# Altium PCB Inverter Processor PCB.PcbDoc (part 1 of 3)
Units mm, origin at the board's own origin, x right, y up, seen from the top; angles counter-clockwise.
Board outline 180 x 80 mm, 4 copper layers (Top Layer, Internal Plane 1, Internal Plane 2, Bottom Layer); 207 components, 146 nets, 658 pads, 294 vias.
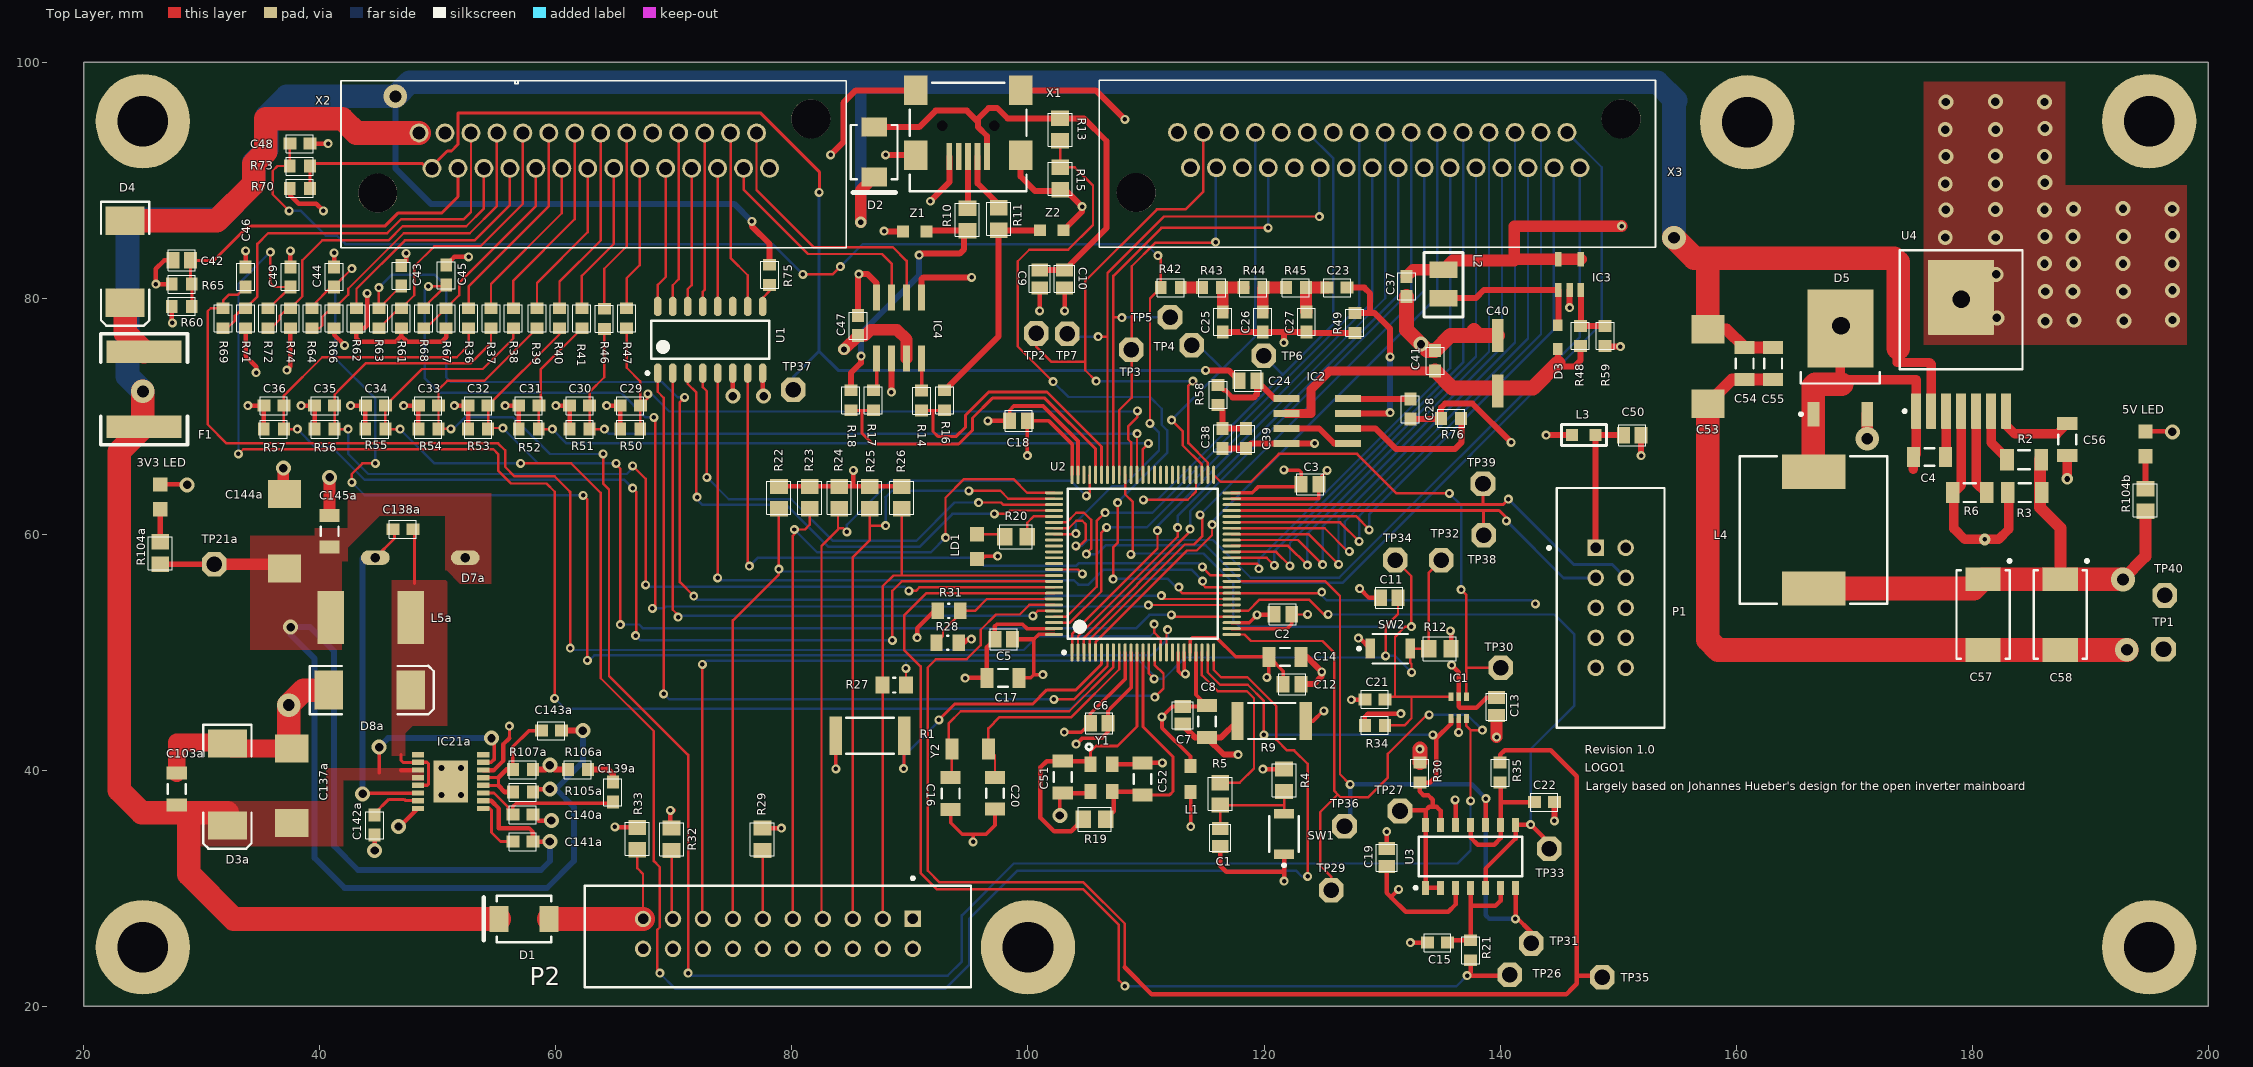
[diagram p0: Top Layer view]
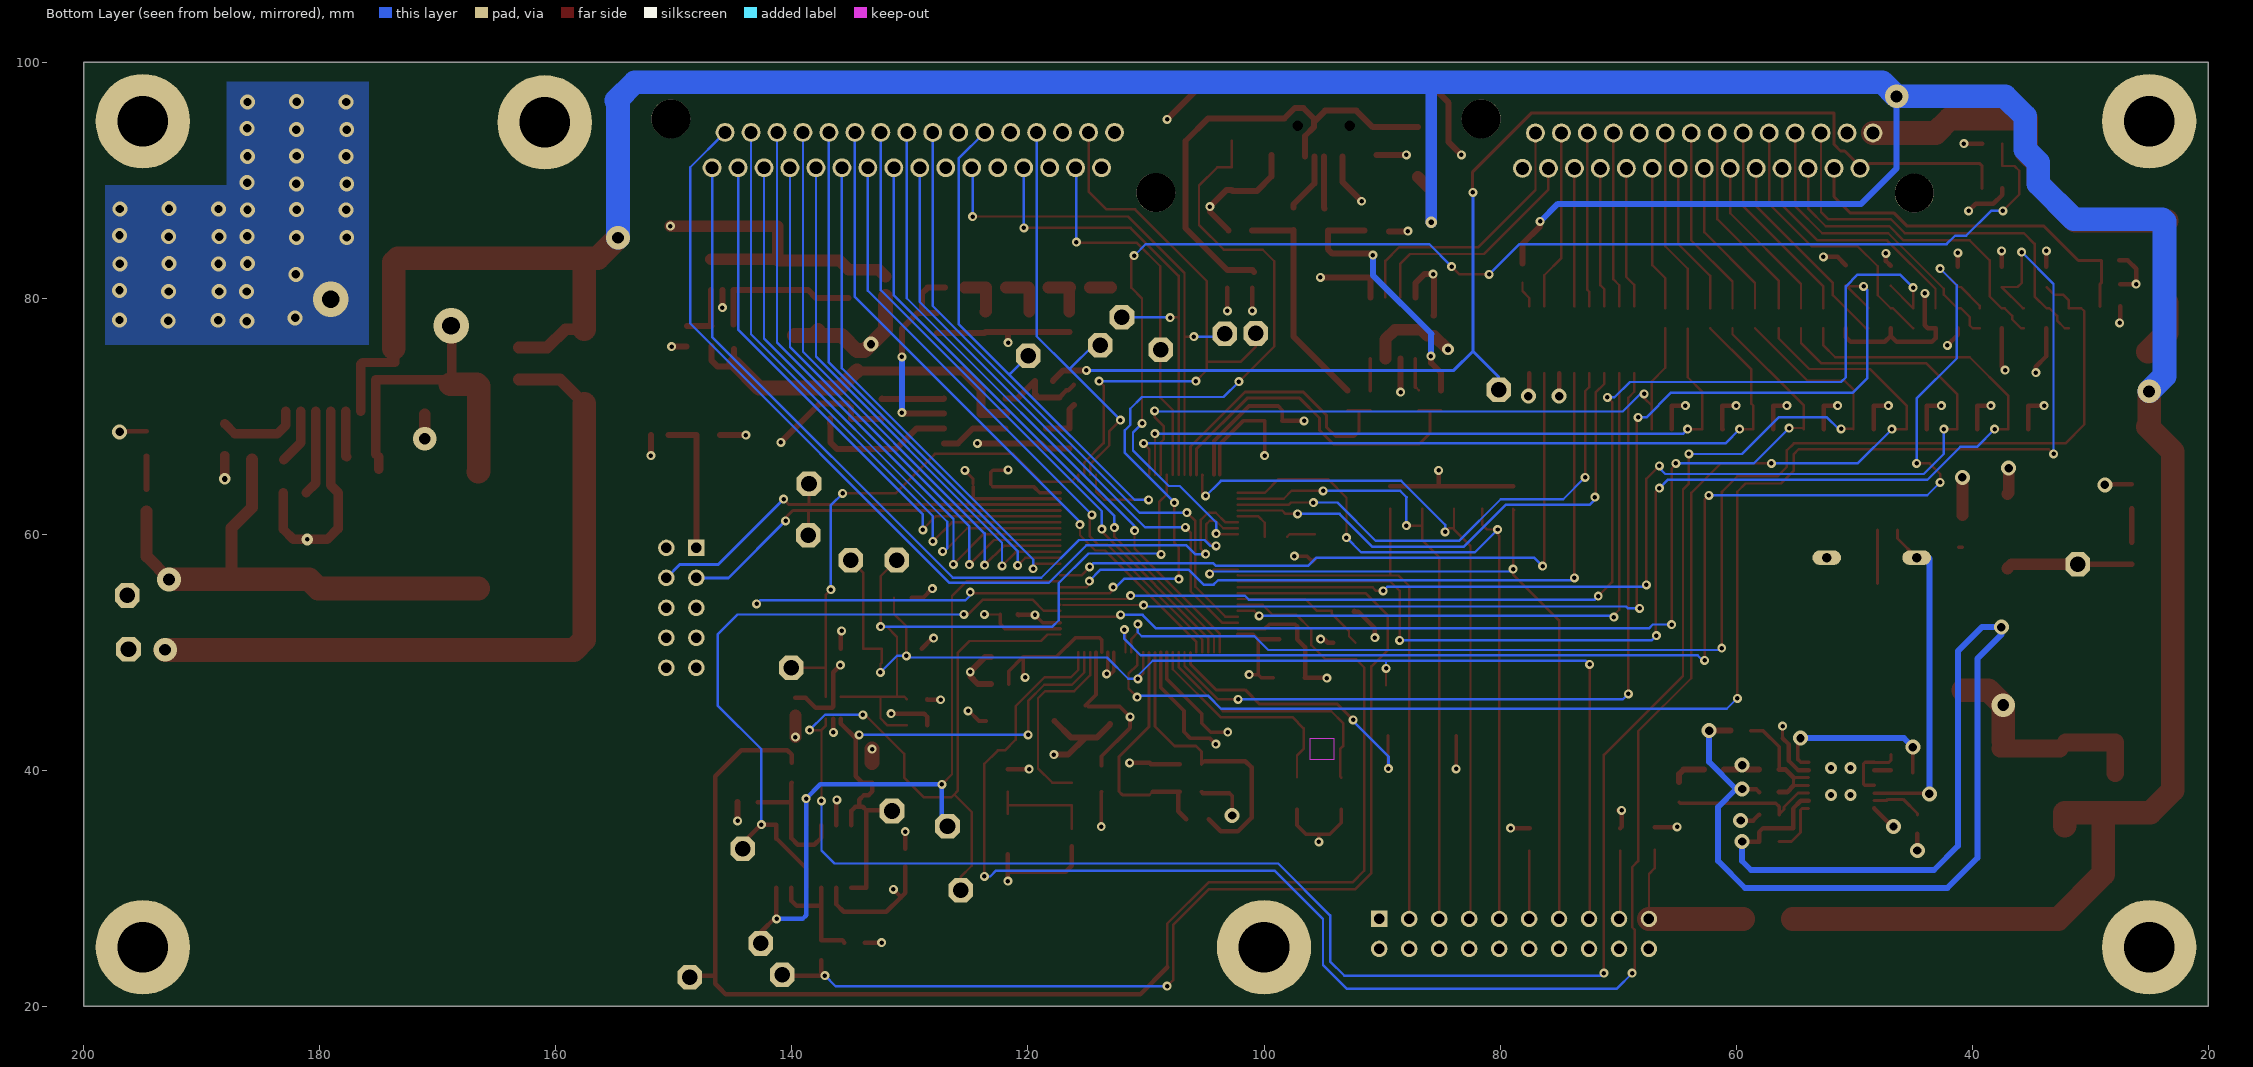
[diagram p1: Bottom Layer view, seen from below]
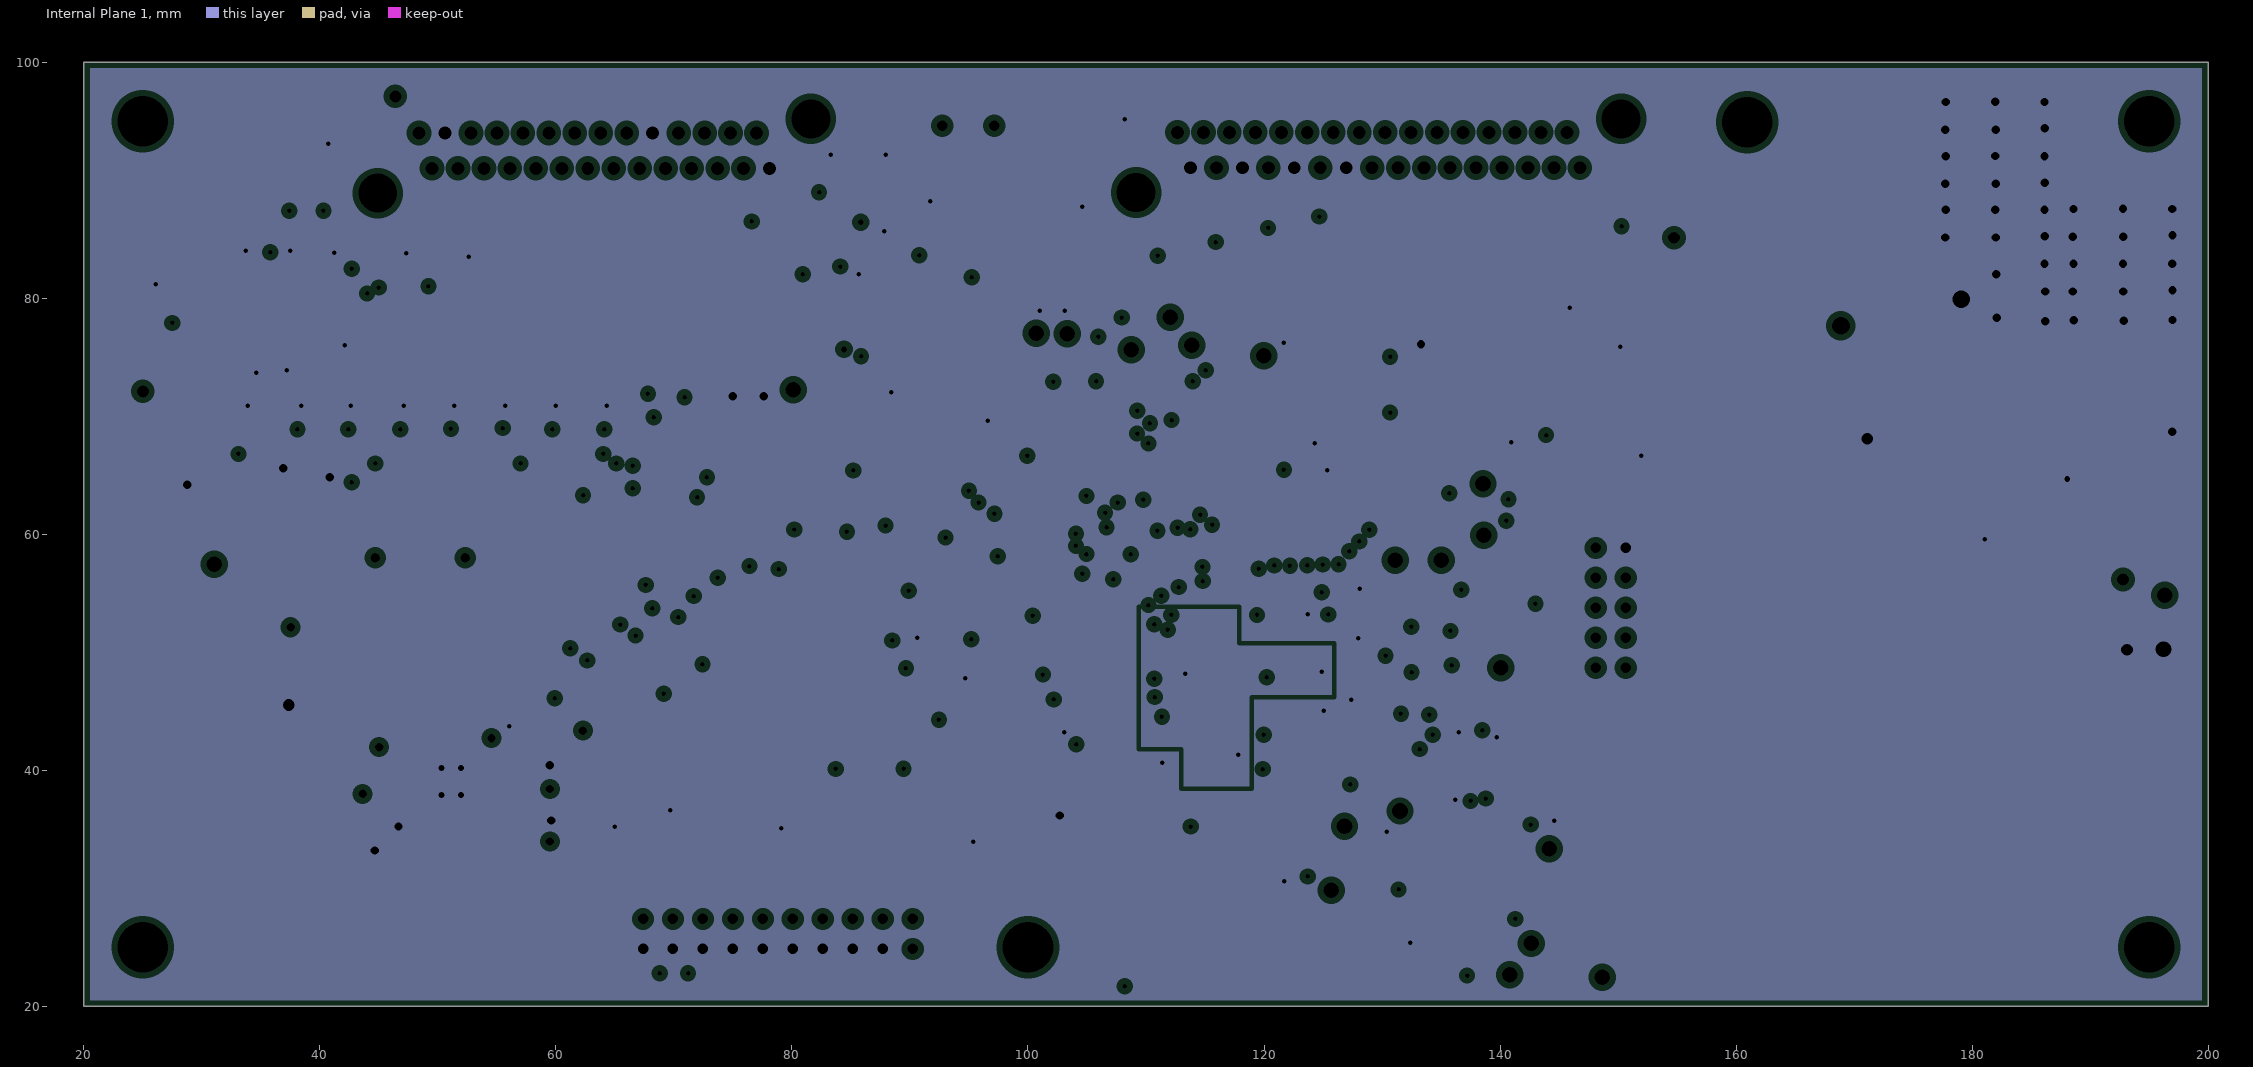
[diagram p2: Internal Plane 1, clearances drawn from the general rule]
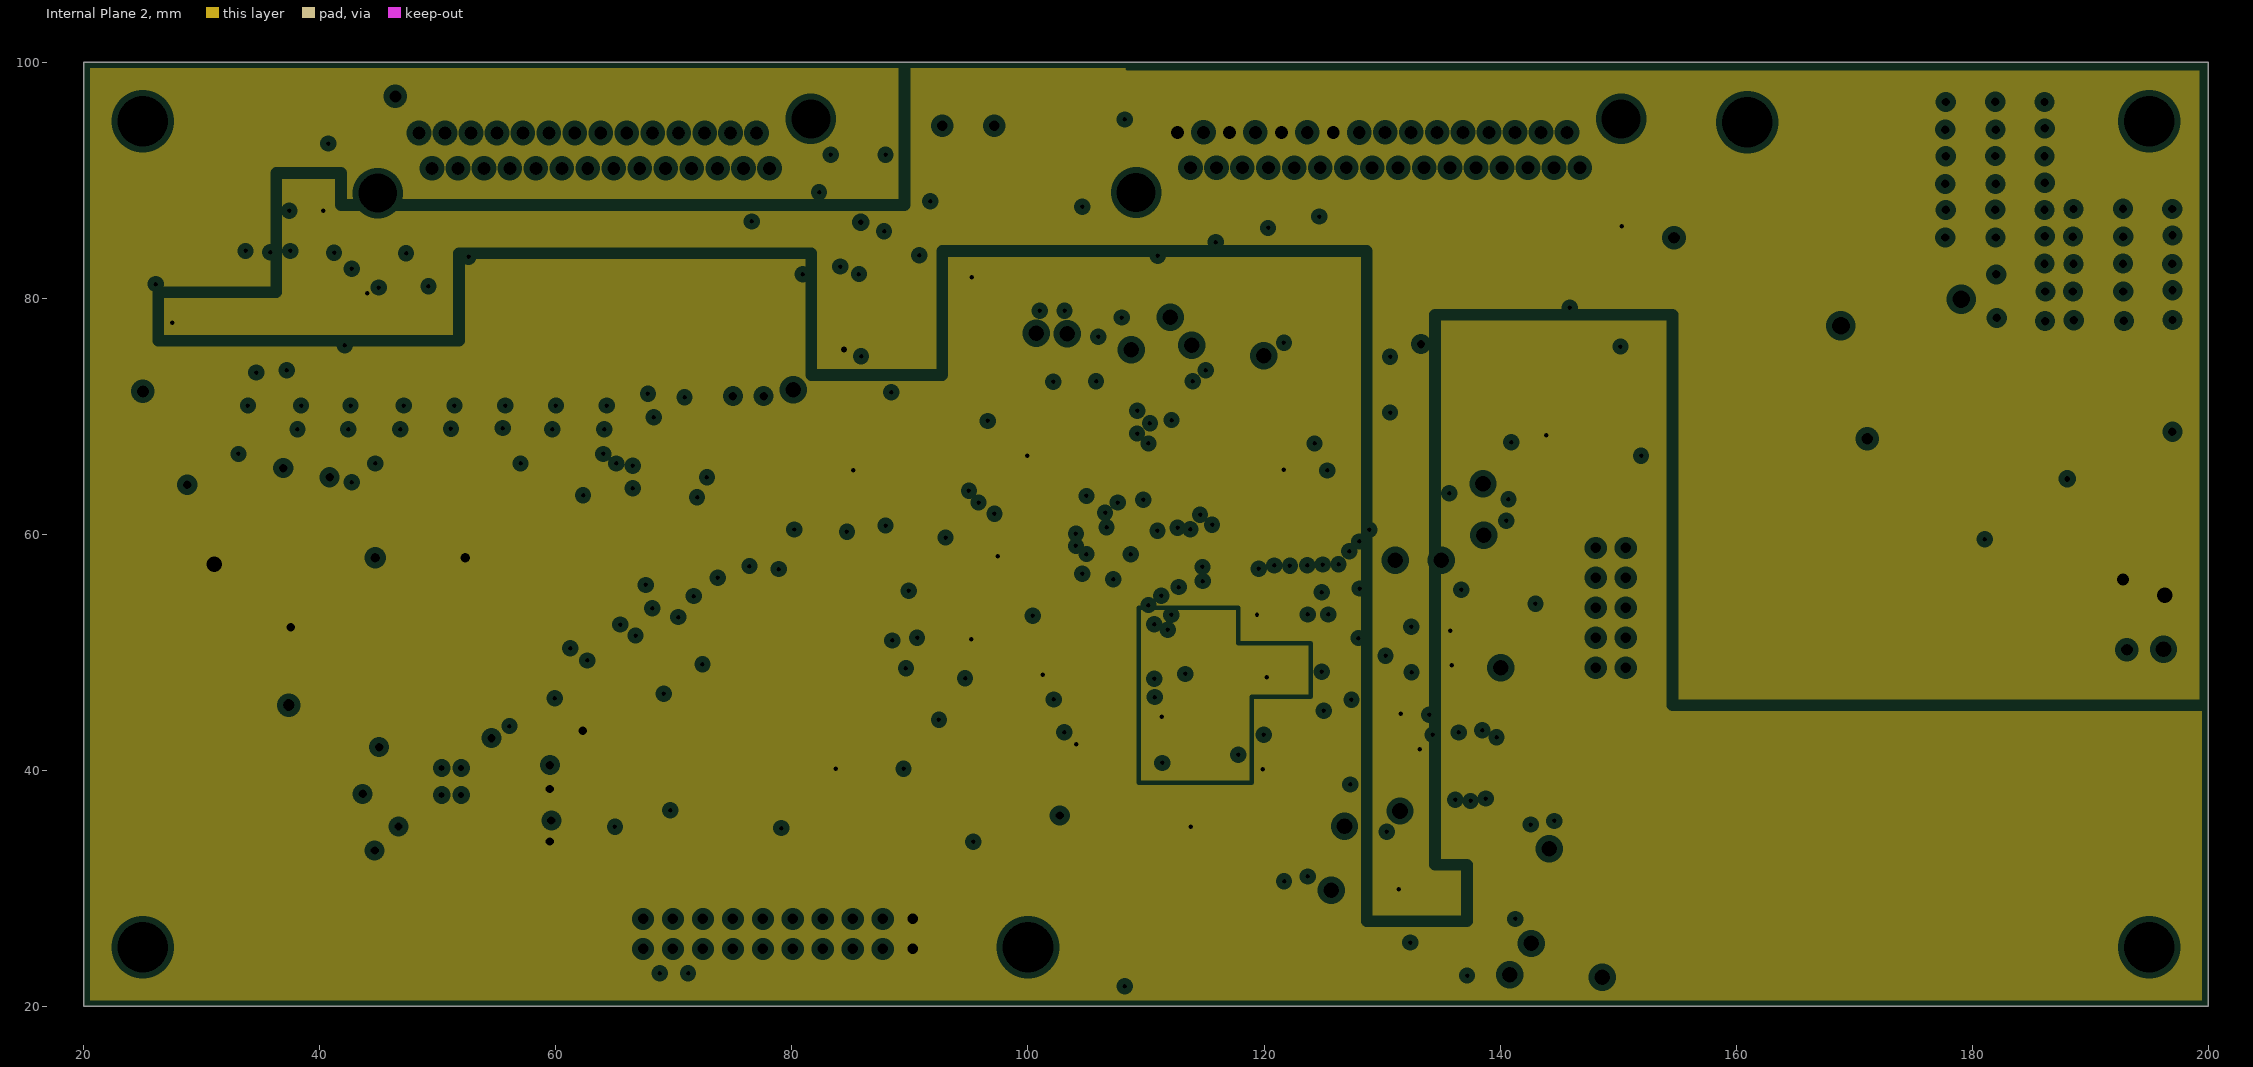
[diagram p3: Internal Plane 2, clearances drawn from the general rule]

## Layer stack, top to bottom
Top Solder: solder mask 0.0102, Solder Resist, Dk 3.5
Top Layer: signal copper 0.0356
Dielectric 1: dielectric 0.32, FR-4, Dk 4.8
Internal Plane 1: plane copper 0.0356, net (Multiple Nets)
Dielectric2: dielectric 0.32, FR-4, Dk 4.8
Internal Plane 2: plane copper 0.0356, net (Multiple Nets)
Dielectric3: dielectric 0.32, FR-4, Dk 4.8
Bottom Layer: signal copper 0.0356
Bottom Solder: solder mask 0.0102, Solder Resist, Dk 3.5

## Board outline
20,20 200,20 200,100 20,100

## Design rules (kind name [scope] priority, off if disabled: settings)
Clearance [All] p1: gap=0.152 ignorepadtopadclearanceinfootprint=TRUE except(0.254: Arc-Via Track-Via; 0.381: SMDPad-THPad SMDPad-Via THPad-THPad THPad-Via)
ComponentClearance [All] p1 off: gap=0.254 collisioncheckmode=3 verticalgap=0.254 showdistances=FALSE
HoleSize [All] p1: absolutevalues=TRUE maxlimit=4.3 minlimit=0.381 maxpercent=80.000 minpercent=20.000
MinimumSolderMaskSliver [All] p1 off: minsoldermaskwidth=0.254
PlaneClearance [All] p1: clearance=0.5
PlaneConnect [All] p1: planeconnectstyle=Relief reliefexpansion=0.508 reliefentries=4 reliefconductorwidth=0.254 reliefairgap=0.254
PolygonConnect [All] p1: connectstyle=Direct reliefconductorwidth=0.381 reliefentries=4 polygonreliefangle="90 Angle" airgapwidth=0.381
RoutingVias [All] p1: holewidth=0.381 width=0.762 viastyle="Through Hole" minholewidth=0.381 minwidth=0.762 maxholewidth=0.711 maxwidth=1.27
SilkToSilkClearance [All] p1 off: silktosilkclearance=0.254
SilkToSolderMaskClearance [IsPad] p1 off: minsilkscreentomaskgap=0.254 clearancetoexposedcopper=TRUE
SolderMaskExpansion [All] p1: expansion=0.102
Width [All] p1: maxlimit=5 minlimit=0.152 preferedwidth=0.254
23 further rules are at their usual default settings.

## Classes and differential pairs
component class "Gate Driver Processor": C1 C2 C3 C5 C6 C7 C8 C9 C10 C11 C12 C13 C14 C15 C16 C17 C18 C19 C20 C21 C22 C23 C24 C25 C26 C27 C28 C29 C30 C31 C32 C33 C34 C35 C36 C37 C38 C39 C40 C41 C42 C43 C44 C45 C46 C47 C48 C49 C50 C51 C52 C59 D1 D2 D3 D11 FID1 IC1 IC2 IC3 IC4 IC5 IC6 L1 L2 L3 LD1 LOGO1 P1 P2 R1 R4 R5 R9 R10 R11 R12 R13 R14 R15 R16 R17 R18 R19 R20 R21 R22 R23 R24 R25 R26 R27 R28 R29 R30 R31 R32 R33 R34 R35 R36 R37 R38 R39 R40 R41 R42 R43 R44 R45 R46 R47 R48 R49 R50 R51 R52 R53 R54 R55 R56 R57 R58 R59 R60 R61 R62 R63 R64 R65 R66 R67 R68 R69 R70 R71 R72 R73 R74 R75 R76 SJ1 SJ2 SW1 SW2 TP2 TP3 TP4 TP5 TP6 TP7 TP26 TP27 TP29 TP30 TP31 TP32 TP33 TP34 TP35 TP36 TP37 TP38 TP39 U1 U2 U3 X1 X2 X3 Y1 Y2 Z1 Z2
component class Power: "3V3 LED" "5V LED" C4 C53 C54 C55 C56 C57 C58 C103a C137a C138a C139a C140a C141a C142a C143a C144a C145a D3a D4 D5 D7a D8a F1 IC21a L4 L5a R2 R3 R6 R104a R104b R105a R106a R107a S1 TP1 TP21a TP40 U4

## Components (designator, comment, footprint, x,y, rotation, side; value= is the part's Value field where it differs from the comment)
"3V3 LED" "PWR" CHIPLED_0805 26.472,63.172 r0 top
"5V LED" "PWR" CHIPLED_0805 194.684,67.659 r0 top
C1 "0.1u" C0805 116.3,34.3 r270 top
C2 "0.1u" C0805 121.6,53.2 r0 top
C3 "0.1u" C0805 123.901,64.237 r0 top
C4 "10nF" C1206 176.378,66.548 r180 top
C5 "0.1u" C0805 97.95,51.1 r180 top
C6 "0.1u" C0805 106.033,43.993 r180 top
C7 "0.01u" C0805 113.132,44.653 r270 top
C8 "1u" C1206 115.164,44.12 r270 top
C9 "0.1u" C0805 100.995,81.629 r270 top
C10 "10u" C0805 103.095,81.629 r270 top
C11 "0.1u" C0805 130.6,54.6 r180 top
C12 "0.01u" C0805 122.377,47.295 r0 top
C13 "0.1u" C0805 139.7,45.4 r270 top
C14 "1u" C1206 121.768,49.606 r0 top
C15 "1µ" C0603 134.7,25.4 r180 top
C16 "22p" C1206 93.447,38.024 r90 top
C17 "4u7" C1206 97.892,47.828 r180 top
C18 "0.1u" C0805 99.2,69.6 r180 top
C19 "0.1u" C0805 130.4,32.6 r90 top
C20 "22p" C1206 97.206,38.049 r90 top
C21 "1nF" C0603 129.4,46 r180 top
C22 "1µ" C0603 143.75,37.3 r0 top
C23 "22n" C0603 126.2,80.9 r0 top
C24 "10µ" C0805 118.643,73 r180 top
C25 "22n" C0603 116.5,78 r270 top
C26 "22n" C0603 119.9,78 r270 top
C27 "22n" C0603 123.6,78 r270 top
C28 "1µ" C0603 132.4,70.6 r90 top
C29 "1µ" C0603 66.301,70.9 r180 top
C30 "1µ" C0603 62.001,70.9 r180 top
C31 "1µ" C0603 57.701,70.9 r180 top
C32 "1µ" C0603 53.401,70.9 r180 top
C33 "1µ" C0603 49.2,70.9 r180 top
C34 "1µ" C0603 44.701,70.9 r180 top
C35 "1µ" C0603 40.401,70.9 r180 top
C36 "1µ" C0603 36.101,70.9 r180 top
C37 "1µ" C0603 132.08,81.001 r270 top
C38 "22n" C0603 116.484,68.123 r90 top
C39 "22n" C0603 118.466,68.097 r90 top
C40 "470µ" UD-6,3X7,7_NICHICON 139.8,74.5 r270 top
C41 "1µ" C0603 134.5,74.7 r270 top
C42 "10µ" C0805 28.3,83.2 r180 top
C43 "1nF" C0603 46.9,81.9 r90 top
C44 "1µ" C0603 41.2,81.8 r90 top
C45 "1nF" C0603 50.7,81.95 r90 top
C46 "1µ" C0603 33.7,81.8 r90 top
C47 "1µ" C0603 85.598,77.673 r90 top
C48 "1nF" C0603 38.3,93.1 r0 top
C49 "1µ" C0603 37.5,81.8 r90 top
C50 "10µ" C0805 151.2,68.4 r0 top
C51 "22p" C1206 102.946,39.421 r270 top
C52 "22p" C1206 109.703,39.268 r90 top
C53 "22uF" SMC_D 157.607,74.219 r270 top
C54 "6.8uF" C1206 160.731,74.473 r270 top
C55 "6.8uF" C1206 163.144,74.473 r270 top
C56 "4.7uF" C1206 188.062,68.021 r270 top
C57 "TPSE227M016R0100" CAPMP7344X43-T_V 180.924,53.188 r270 top
C58 "TPSE227M016R0100" CAPMP7344X43-T_V 187.477,53.188 r270 top
C103a "4.7uF" C1206 27.869,38.407 r90 top
C137a "10uF" SMC_D 37.615,38.686 r90 top
C138a "0.68uF" C0603 47.041,60.427 r0 top
C139a "4700pF" C0603 64.826,38.153 r90 top
C140a "470pF" C0603 57.206,36.248 r0 top
C141a "0.1uF" C0603 57.206,33.962 r0 top
C142a "1uF" C0603 44.633,35.359 r270 top
C143a "27pF" C0603 59.619,43.36 r180 top
C144a "100uF 10V" SMC_D 37.013,60.251 r90 top
C145a "4.7uF" C1206 40.823,60.251 r90 top
D1 "STPS160U" STM-SMB_P_V 57.3,27.4 r180 top
D2 "STPS160U" STM-SMB_P_V 86.97,92.38 r270 top
D3 "SBR1A40S3-7" SOD-323F 144.9,76.7 r270 top
D3a "SCHOTTKY-DIODESMC" SMC 32.154,38.788 r270 top
D4 "*" SMC 23.5,83.1 r270 top
D5 "GB05SLT12-252" GESC-TO-252-3_M 168.834,74.919 r90 top
D7a "1N4148DO35-7" DO35-7 48.507,58.01 r0 top
D8a "MBRS3*0T3" SMC 44.219,46.789 r0 top
F1 "LITTILEFUSE 1A" 2225 25.1,75.45 r270 top
IC1 "NC7SZ10P6X" SC70-6 136.5,45.3 r0 top
IC2 "TDA2822D" SO08 124.5,69.6 r270 top
IC3 "MIC2288YD5" SOT23-5L 145.9,82 r0 top
IC4 "MCP2562P" SO08 89.078,77.47 r0 top
IC21a "LT3434" TSSOP16EXP 51.077,39.042 r270 top
L1 "MH2029-300Y" 0805 113.767,39.268 r90 top
L2 "10µH" L2825P 135.204,81.204 r270 top
L3 "10µH" L2012C 147.1,68.4 r0 top
L4 "7447715004" WE-PD-LS 166.573,60.35 r270 top
L5a "33uH" MS85 44.316,52.93 r90 top
LD1 "PWR" CHIPLED_0805 95.682,58.945 r0 top
LOGO1 "OSHW-LOGOM" OSHW-LOGO-M 157.455,34.239 r90 top
P1 "5103308-1" TECO-5103308-1_V 149.37,53.76 r270 top
P2 "N2520-6002RB" 3M-N2520-6002RB_V 78.81,26.13 r180 top
R1 "Jumper 2512(6432)" RESC2512(6432)_L 86.614,42.926 r0 top value="0.00 Ohm"
R2 "0R" RESC1206(3216)_N 184.404,66.319 r0 top value="1000.00 Ohm"
R3 "DNF" RESC1206(3216)_N 184.455,63.525 r0 top value="1000.00 Ohm"
R4 "10k%" R0805 121.7,39.15 r90 top
R5 "560R 1%" R0805 116.3,38 r270 top
R6 "1K" RESC1206(3216)_N 179.807,63.525 r0 top value="1000.00 Ohm"
R9 "Jumper 2512(6432)" RESC2512(6432)_L 120.65,44.171 r0 top value="0.00 Ohm"
R10 "24R" R0805 94.869,86.665 r90 top
R11 "24R" R0805 97.511,86.716 r90 top
R12 "10k%" R0805 134.9,50.3 r0 top
R13 "15K" R0805 102.718,94.285 r270 top
R14 "0R" R0603 90.983,71.323 r270 top
R15 "22K" R0805 102.743,90.134 r270 top
R16 "DNF" R0603 92.939,71.349 r270 top
R17 "0R" R0603 86.893,71.349 r270 top
R18 "DNF" R0603 84.988,71.349 r270 top
R19 "1M%" R0805 105.639,35.839 r0 top
R20 "1K" R0805 98.984,59.792 r180 top
R21 "10k" R0603 137.5,24.75 r90 top
R22 "10k%" R0805 78.9,63.1 r90 top
R23 "10k%" R0805 81.5,63.1 r90 top
R24 "10k%" R0805 84,63.1 r90 top
R25 "10k%" R0805 86.6,63.1 r90 top
R26 "10k%" R0805 89.3,63.1 r90 top
R27 "RC0805JR-070RL" RESC2013X60X35ML10T20 88.662,47.219 r180 top
R28 "Jumper 0805(2012)" RESC0805(2012)_N 93.2,50.8 r0 top value="0.00 Ohm"
R29 "10k%" R0805 77.5,34.15 r90 top
R30 "10k" R0603 133.2,39.8 r90 top
R31 "Jumper 0805(2012)" RESC0805(2012)_N 93.3,53.5 r0 top value="0.00 Ohm"
R32 "10k%" R0805 69.8,34.15 r90 top
R33 "47k%" R0805 66.9,34.2 r90 top
R34 "10k" R0603 129.4,43.8 r180 top
R35 "10k" R0603 140,39.8 r270 top
R36 "3k3" R0603 52.6,78.3 r270 top
R37 "3k3" R0603 54.5,78.3 r270 top
R38 "3k3" R0603 56.4,78.3 r270 top
R39 "4k7" R0603 58.4,78.3 r270 top
R40 "3k3" R0603 60.3,78.3 r270 top
R41 "3k3" R0603 62.2,78.3 r270 top
R42 "510" R0603 112.1,80.9 r0 top
R43 "10k" R0603 115.6,80.9 r0 top
R44 "3k3" R0603 119.1,80.9 r0 top
R45 "3k3" R0603 122.7,80.9 r0 top
R46 "3k3" R0603 64.1,78.25 r270 top
R47 "3k3" R0603 66,78.3 r270 top
R48 "3k3" R0603 146.8,76.8 r270 top
R49 "10k" R0603 127.7,77.9 r90 top
R50 "1k2" R0603 66.3,68.9 r0 top
R51 "1k2" R0603 62,68.9 r0 top
R52 "1k2" R0603 57.7,68.9 r0 top
R53 "1k2" R0603 53.4,68.9 r0 top
R54 "1k2" R0603 49.2,68.9 r0 top
R55 "1k2" R0603 44.7,68.9 r0 top
R56 "1k2" R0603 40.4,68.9 r0 top
R57 "1k2" R0603 36.1,68.9 r0 top
R58 "10R" R0603 116.103,71.806 r90 top
R59 "510" R0603 148.9,76.8 r90 top
R60 "120R/510R" R0603 28.3,79.3 r180 top
R61 "510" R0603 46.9,78.3 r90 top
R62 "510" R0603 43.1,78.3 r270 top
R63 "10k" R0603 45,78.3 r270 top
R64 "10k" R0603 39.35,78.3 r90 top
R65 "220" R0603 28.3,81.2 r0 top
R66 "510" R0603 41.2,78.3 r270 top
R67 "510" R0603 50.7,78.3 r90 top
R68 "10k" R0603 48.8,78.3 r270 top
R69 "10k" R0603 31.8,78.3 r90 top
R70 "510" R0603 38.3,89.3 r0 top
R71 "10k" R0603 33.7,78.3 r90 top
R72 "10k" R0603 35.6,78.3 r90 top
R73 "10k" R0603 38.3,91.2 r0 top
R74 "10k" R0603 37.5,78.3 r90 top
R75 "0R" R0603 78.105,81.977 r270 top
R76 "0R" R0603 135.853,69.825 r180 top
R104a "1K" R0805 26.472,58.407 r270 top
R104b "1K" R0805 194.684,62.894 r270 top
R105a "195K" R0603 57.206,38.153 r180 top
R106a "10K" R0603 61.866,40.058 r0 top
R107a "100K" R0603 57.206,40.058 r180 top
SW1 "B3U-1000P" OMRON-B3U-1000_V 121.7,34.6 r90 top
SW2 "B3U-1000P" OMRON-B3U-1000_V 130.7,50.3 r0 top
TP1 "PTR1PAD1-13" P1-13 196.215,50.267 r0 top
TP2 "PTR1PAD1-13" P1-13 100.711,77.013 r0 top
TP3 "PTR1PAD1-13" P1-13 108.763,75.641 r0 top
TP4 "PTR1PAD1-13" P1-13 113.868,76.022 r0 top
TP5 "PTR1PAD1-13" P1-13 112.039,78.384 r0 top
TP6 "PTR1PAD1-13" P1-13 119.964,75.133 r0 top
TP7 "PTR1PAD1-13" P1-13 103.327,76.987 r0 top
TP21a "PTR1PAD1-13" P1-13 31.044,57.457 r90 top
TP26 "PTR1PAD1-13" P1-13 140.818,22.682 r90 top
TP27 "PTR1PAD1-13" P1-13 131.521,36.551 r90 top
TP29 "PTR1PAD1-13" P1-13 125.705,29.82 r90 top
TP30 "PTR1PAD1-13" P1-13 140.056,48.692 r90 top
TP31 "PTR1PAD1-13" P1-13 142.646,25.324 r90 top
TP32 "PTR1PAD1-13" P1-13 135.026,57.785 r90 top
TP33 "PTR1PAD1-13" P1-13 144.17,33.35 r90 top
TP34 "PTR1PAD1-13" P1-13 131.115,57.81 r90 top
TP35 "PTR1PAD1-13" P1-13 148.666,22.454 r90 top
TP36 "PTR1PAD1-13" P1-13 126.822,35.255 r90 top
TP37 "PTR1PAD1-13" P1-13 80.112,72.238 r90 top
TP38 "PTR1PAD1-13" P1-13 138.608,59.919 r90 top
TP39 "PTR1PAD1-13" P1-13 138.557,64.287 r90 top
TP40 "PTR1PAD1-13" P1-13 196.317,54.813 r90 top
U1 "ULN2003ADR" D0016A_M 73.075,76.475 r90 top
U2 "STM32F103VGT6" STM-LQFP100_L 109.735,57.507 r90 top
U3 "LM2901VDG" ONSC-SOIC-14-751A-03_V 137.5,32.7 r90 top
U4 "LM22679TJ-5.0/NOPB" NDR0007A_L 179.07,76.276 r90 top
X1 "1734035-2" TECO-1734035-2-5_V 94.93,92.015 r180 top
X2 "*" CONN_MX34028UF2 48.4,94 r0 top
X3 "MX34032UF1" PCBComponent_1 112.666,94.049 r0 top
Y1 "8MHz KX-7 20pF" CRYSTAL-3.2-2.5 106.223,39.345 r270 top
Y2 "32.768Khz" ARDUINO_WIFI_SHIELD_V018_TG_RESONATOR_EPSON_FC_145 95.1,41.8 r180 top
Z1 "CG0603MLC-05E" CT/CN0603 90.399,85.649 r180 top
Z2 "CG0603MLC-05E" CT/CN0603 102.006,85.75 r0 top

## Footprints (in the part's own frame and the unit in brackets; to place one, negate y for a bottom-side part, rotate by r counter-clockwise, add the part's x,y. Pads: shape width x height; smd on the part's side, far side on the other; paste and mask are expansions set on the pad)
3M-N2520-6002RB_V [mm] "CONN, 20-Leads, Body 32.72x8.59mm, Picth 2.54mm"
  rect 1.4x1.4 hole 0.89: 1(-11.43,-1.27)
  round 1.4 hole 0.89: 2(-11.43,1.27) 3(-8.89,-1.27) 4(-8.89,1.27) 5(-6.35,-1.27) 6(-6.35,1.27) 7(-3.81,-1.27) 8(-3.81,1.27) 9(-1.27,-1.27) 10(-1.27,1.27) 11(1.27,-1.27) 12(1.27,1.27) 13(3.81,-1.27) 14(3.81,1.27) 15(6.35,-1.27) 16(6.35,1.27) 17(8.89,-1.27) 18(8.89,1.27) 19(11.43,-1.27) 20(11.43,1.27)
  silkscreen extent -16.36,-4.84 16.36,4.52, body extent -16.36,-4.07 16.36,4.52, height 9.91
0805 [mm] "0805"
  rect 1.2x1 smd: 1(-1.1,0) 2(1.1,0)
2225 [mm]
  rect 1.905x6.35 smd: 1(0,0) 2(6.35,0)
  silkscreen extent -1.52,-3.68 7.87,3.68
ARDUINO_WIFI_SHIELD_V018_TG_RESONATOR_EPSON_FC_145 [mm] "ARDUINO_WIFI_SHIELD_V018_TG_RESONATOR_EPSON_FC_145"
  rect 1.1x1.8 smd: P$1(-1.55,0) P$2(1.55,0)
  Bottom Layer keep-out region: -1,-0.9 1,-0.9 1,0.9 -1,0.9
C0603 [mm] "C0603"
  rect 1.1x1 smd: 1(-0.85,0) 2(0.85,0)
  silkscreen extent -1.14,-0.76 1.14,0.76
C0805 [mm] "Chip Capacitor, Body 2.0x1.3mm, IPC High Density"
  rect 1.1x1.4 smd: 1(-0.75,0) 2(0.75,0)
  silkscreen extent -1.14,-0.89 1.14,0.89
C1206 [mm] "Chip Capacitor, Body 3.2x1.6mm, IPC High Density"
  rect 1.1x1.7 smd: 1(-1.35,0) 2(1.35,0)
  silkscreen extent -0.4,-0.75 0.4,0.75, body extent -1.7,-0.9 1.7,0.9, height 1.3
CAPMP7344X43-T_V [mm] "Molded Capacitor, 2-Leads, Body 7.50x4.5mm"
  rect 2x3 smd: 1(-3,0) 2(3,0)
  silkscreen extent -4.67,-2.25 3.75,2.38, body extent -3.97,-2.25 3.97,2.25, height 4.3
CHIPLED_0805 [mm] "CHIPLED_0805"
  rect 1.2x1.2 smd: A(0,-1.05) C(0,1.05)
CONN_MX34028UF2 [mil] "JAE 28 way vertical connector 2.2mm pitch"
  round 63 hole 43 mask+0: 1(0,0) 2(43.31,-118.11) 3(86.61,0) 4(129.92,-118.11) 5(173.23,0) 6(216.54,-118.11) 7(259.84,0) 8(303.15,-118.11) 9(346.46,0) 10(389.76,-118.11) 11(433.07,0) 12(476.38,-118.11) 13(519.69,0) 14(562.99,-118.11) 15(606.3,-0.16) 16(649.61,-118.11) 17(692.91,0) 18(736.22,-118.11) 19(779.53,0) 20(822.83,-118.11) 21(866.14,0) 22(909.45,-118.11) 23(952.76,0) 24(996.06,-118.11) 25(1039.37,0) 26(1082.68,-118.11) 27(1125.98,0) 28(1169.29,-118.11)
  round 130 hole 130: 29(-137.72,-200.94) 30(1307.17,47.09)
  silkscreen extent -261,-383 1425,174
CRYSTAL-3.2-2.5 [mm] "CRYSTAL-3.2-2.5"
  rect 1.3x1.05 smd: 1(-1.15,-0.925) 2(1.15,-0.925) 3(1.15,0.925) 4(-1.15,0.925)
CT/CN0603 [mm] "CT/CN0603"
  rect 1x1 smd: 1(-1,0) 2(1,0)
D0016A_M [mm] "SOIC, 16-Leads, Body 10x4mm, Pitch 1.27mm, IPC Low Density"
  oval 1.65x0.65 smd: 1(-2.825,4.445) 2(-2.825,3.175) 3(-2.825,1.905) 4(-2.825,0.635) 5(-2.825,-0.635) 6(-2.825,-1.905) 7(-2.825,-3.175) 8(-2.825,-4.445) 9(2.825,-4.445) 10(2.825,-3.175) 11(2.825,-1.905) 12(2.825,-0.635) 13(2.825,0.635) 14(2.825,1.905) 15(2.825,3.175) 16(2.825,4.445)
  silkscreen extent -2.95,-5 1.6,5.44, body extent -3,-4.95 3,4.95, height 1.59
DO35-7 [mil] "DO35-7"
  oval 96x48 hole 32: A(150,0) C(-150,0)
GESC-TO-252-3_M [mm] "DPAK, 3-Leads, Body 6.75x5.8mm, Pitch 4.57mm, IPC Low Density"
  rect 2.05x1 smd: 1(-4.75,2.285) 2(-4.75,-2.285)
  rect 6.6x5.6 smd: 3(2.5,0)
  silkscreen extent -4.87,-3.35 -1.2,3.46, body extent -2.15,-3.37 3.65,3.37, height 2.38
L2012C [mm] "L2012C"
  rect 1x1 smd: 1(-1,0) 2(1,0)
  silkscreen extent -1.91,-0.89 1.91,0.89
L2825P [mm] "L2825P"
  rect 1.4x2.4 smd: 1(-1.2,0) 2(1.2,0)
  silkscreen extent -2.67,-1.65 2.79,1.65
MS85 [mm] "MS85"
  rect 4.5x2.25 smd: 1(0,-3.383) 2(0,3.383)
NDR0007A_L [mm] "DPAK, 7-Leads, Body 10.4x10.1mm, Pitch 1.27mm, IPC High Density"
  rrect12% 3x0.85 smd: 1(-5.85,3.81) 2(-5.85,2.54) 3(-5.85,1.27) 4(-5.85,0) 5(-5.85,-1.27) 6(-5.85,-2.54) 7(-5.85,-3.81)
  rrect2% 6.35x5.59 smd: 8(3.8,0)
  silkscreen extent -5.97,-5.2 7.8,5.2, body extent -6.21,-5.08 7.8,5.08, height 2.17
OMRON-B3U-1000_V [mm] "SMD, 2-Leads, Body 3x2.5mm"
  rect 0.8x1.7 smd: 1(-1.7,0) 2(1.7,0)
  silkscreen extent -2.77,-1.25 1.5,1.25, body extent -1.5,-1.25 1.5,1.25, height 1.75
ONSC-SOIC-14-751A-03_V [mm] "SOIC, 14-Leads, Body 8.75x4mm, Pitch 1.27mm"
  rect 1.18x0.58 smd: 1(-2.66,3.81) 2(-2.66,2.54) 3(-2.66,1.27) 4(-2.66,0) 5(-2.66,-1.27) 6(-2.66,-2.54) 7(-2.66,-3.81) 8(2.66,-3.81) 9(2.66,-2.54) 10(2.66,-1.27) 11(2.66,0) 12(2.66,1.27) 13(2.66,2.54) 14(2.66,3.81)
  silkscreen extent -2.78,-4.38 1.67,4.77, body extent -2,-4.38 2,4.38, height 1.75
OSHW-LOGO-M [mm] "OSHW-LOGO-M"
P1-13 [mil] "P1-13"
  oct 82.3x82.3 hole 52: TP(0,0)
PCBComponent_1 [mil]
  round 63 hole 43 mask+0: 1(0,0) 2(43.31,-118.11) 3(86.61,0) 4(129.92,-118.11) 5(173.23,0) 6(216.54,-118.11) 7(259.84,0) 8(303.15,-118.11) 9(346.46,0) 10(389.76,-118.11) 11(433.07,0) 12(476.38,-118.11) 13(519.68,0) 14(562.99,-118.11) 15(606.3,-0.16) 16(649.61,-118.11) 17(692.91,0) 18(736.22,-118.11) 19(779.53,0) 20(822.83,-118.11) 21(866.14,0) 22(909.45,-118.11) 23(952.76,0) 24(996.06,-118.11) 25(1039.37,0) 26(1082.68,-118.11) 27(1125.98,0) 28(1169.29,-118.11) 29(1212.6,0) 30(1255.91,-118.11) 31(1299.21,0) 32(1342.52,-118.11)
  round 130 hole 130: 33(-137.72,-200.94) 34(1480.31,45.28)
  silkscreen extent -261,-383 1594,174
R0603 [mm] "R0603"
  rect 1x1.1 smd: 1(-0.85,0) 2(0.85,0)
  silkscreen extent -1.14,-0.76 1.14,0.76
R0805 [mm] "R0805"
  rect 1.3x1.5 smd: 1(-0.95,0) 2(0.95,0)
  silkscreen extent -1.4,-1.02 1.4,1.02
RESC0805(2012)_N [mm] "Chip Resistor, Body 2.0x1.3mm, IPC Medium Density"
  rect 1.05x1.4 smd: 1(-0.95,0) 2(0.95,0)
  silkscreen extent -0.05,-0.6 0.05,0.6, body extent -1.1,-0.67 1.1,0.68, height 0.7
RESC1206(3216)_N [mm] "Chip Resistor, Body 3.2x1.6mm, IPC Medium Density"
  rect 1.15x1.8 smd: 1(-1.45,0) 2(1.45,0)
  silkscreen extent -0.5,-0.8 0.5,0.8, body extent -1.67,-0.87 1.67,0.87, height 0.75
RESC2013X60X35ML10T20 [mm] "Chip Resistor, 2-Leads, Body 2.1x1.35mm, IPC Low Density"
  rect 1.2x1.45 smd: 1(-1,0) 2(1,0)
  silkscreen extent -0.1,-0.63 0.1,0.63, body extent -1.05,-0.68 1.05,0.67, height 0.6
RESC2512(6432)_L [mm] "Chip Resistor, Body 6.4x3.2mm, IPC High Density"
  rect 1.05x3.25 smd: 1(-2.9,0) 2(2.9,0)
  silkscreen extent -2,-1.52 2,1.53, body extent -3.25,-1.7 3.25,1.7, height 0.75
SC70-6 [mm] "SC70-6"
  rect 0.4x0.75 smd paste-0.375: 1(-0.65,-0.925) 2(0,-0.925) 3(0.65,-0.925) 4(0.65,0.925) 5(0,0.925) 6(-0.65,0.925)
SMC [mm] "DO-214-AB/SMC; 2 C-Bend Leads; Body 7.9 x 5.9 mm, inc. leads (LxW)"
  rect 2.4x3.3 smd: 1(-3.475,0) 2(3.475,0)
  silkscreen extent -5.07,-2.05 5.43,2.05
SMC_D [mm] "SMC_D"
  rect 2.4x2.8 smd: +(-3.15,0) -(3.15,0)
SO08 [mm] "SO08"
  rect 0.6x2.2 smd: 1(-1.905,-2.6) 2(-0.635,-2.6) 3(0.635,-2.6) 4(1.905,-2.6) 5(1.905,2.6) 6(0.635,2.6) 7(-0.635,2.6) 8(-1.905,2.6)
SOD-323F [mm] "SOD-323F"
  rect 1x0.8 smd: A(-1,0) C(1,0)
SOT23-5L [mm] "SOT23-5L"
  rect 0.55x1.2 smd: 1(-0.95,-1.3) 2(0,-1.3) 3(0.95,-1.3) 4(0.95,1.3) 5(-0.95,1.3)
STM-LQFP100_L [mm] "Thin QFP, 100-Leads, Body 14x14mm, Pitch 0.5mm, IPC High Density"
  oval 1.55x0.25 smd: 1(-7.525,6) 2(-7.525,5.5) 3(-7.525,5) 4(-7.525,4.5) 5(-7.525,4) 6(-7.525,3.5) 7(-7.525,3) 8(-7.525,2.5) 9(-7.525,2) 10(-7.525,1.5) 11(-7.525,1) 12(-7.525,0.5) 13(-7.525,0) 14(-7.525,-0.5) 15(-7.525,-1) 16(-7.525,-1.5) 17(-7.525,-2) 18(-7.525,-2.5) 19(-7.525,-3) 20(-7.525,-3.5) 21(-7.525,-4) 22(-7.525,-4.5) 23(-7.525,-5) 24(-7.525,-5.5) 25(-7.525,-6) 51(7.525,-6) 52(7.525,-5.5) 53(7.525,-5) 54(7.525,-4.5) 55(7.525,-4) 56(7.525,-3.5) 57(7.525,-3) 58(7.525,-2.5) 59(7.525,-2) 60(7.525,-1.5) 61(7.525,-1) 62(7.525,-0.5) 63(7.525,0) 64(7.525,0.5) 65(7.525,1) 66(7.525,1.5) 67(7.525,2) 68(7.525,2.5) 69(7.525,3) 70(7.525,3.5) 71(7.525,4) 72(7.525,4.5) 73(7.525,5) 74(7.525,5.5) 75(7.525,6)
  oval 0.25x1.55 smd: 26(-6,-7.525) 27(-5.5,-7.525) 28(-5,-7.525) 29(-4.5,-7.525) 30(-4,-7.525) 31(-3.5,-7.525) 32(-3,-7.525) 33(-2.5,-7.525) 34(-2,-7.525) 35(-1.5,-7.525) 36(-1,-7.525) 37(-0.5,-7.525) 38(0,-7.525) 39(0.5,-7.525) 40(1,-7.525) 41(1.5,-7.525) 42(2,-7.525) 43(2.5,-7.525) 44(3,-7.525) 45(3.5,-7.525) 46(4,-7.525) 47(4.5,-7.525) 48(5,-7.525) 49(5.5,-7.525) 50(6,-7.525) 76(6,7.525) 77(5.5,7.525) 78(5,7.525) 79(4.5,7.525) 80(4,7.525) 81(3.5,7.525) 82(3,7.525) 83(2.5,7.525) 84(2,7.525) 85(1.5,7.525) 86(1,7.525) 87(0.5,7.525) 88(0,7.525) 89(-0.5,7.525) 90(-1,7.525) 91(-1.5,7.525) 92(-2,7.525) 93(-2.5,7.525) 94(-3,7.525) 95(-3.5,7.525) 96(-4,7.525) 97(-4.5,7.525) 98(-5,7.525) 99(-5.5,7.525) 100(-6,7.525)
  silkscreen extent -7.65,-6.35 6.35,6.8, body extent -7,-7 7,7, height 1.6
STM-SMB_P_V [mm] "SMB, 2-Leads, Body 4.325x3.625mm"
  rect 1.62x2.18 smd: 1(-2.11,0) 2(2.11,0)
  silkscreen extent -2.3,-1.97 3.42,1.97, body extent -2.16,-1.81 2.16,1.81, height 2.59
TECO-1734035-2-5_V [mm] "SMD, 5-Leads, Body 9.9x9.2mm, Pitch 0.8mm"
  rect 0.5x2.3 smd: 1(-1.6,0) 2(-0.8,0) 3(0,0) 4(0.8,0) 5(1.6,0)
  rect 2x2.5 smd: 6(-4.45,-0.1) 7(4.45,-0.1) 8(-4.45,-5.6) 9(4.45,-5.6)
  round 0.6 hole 0.9 unplated: 10(-2.2,-2.6) 11(2.2,-2.6)
  silkscreen extent -4.95,-6.25 4.95,2.95, body extent -4.95,-6.25 4.95,2.95, height 4.09
TECO-5103308-1_V [mm] "Connector, 10-Leads, Body 20.32x9.14mm, Pitch 2.54mm"
  rect 1.4x1.4 hole 0.89: 1(-5.08,-1.27)
  round 1.4 hole 0.89: 2(-5.08,1.27) 3(-2.54,-1.27) 4(-2.54,1.27) 5(0,-1.27) 6(0,1.27) 7(2.54,-1.27) 8(2.54,1.27) 9(5.08,-1.27) 10(5.08,1.27)
  silkscreen extent -10.16,-5.34 10.16,4.57, body extent -10.16,-4.57 10.16,4.57, height 9.86
TSSOP16EXP [mm] "TSSOP16EXP"
  rect 0.45x1.05 smd mask-0.525: 1(-2.275,-2.768) 2(-1.625,-2.768) 3(-0.975,-2.768) 4(-0.325,-2.768) 5(0.325,-2.768) 6(0.975,-2.768) 7(1.625,-2.768) 8(2.275,-2.768) 9(2.275,2.768) 10(1.625,2.768) 11(0.975,2.768) 12(0.325,2.768) 13(-0.325,2.768) 14(-0.975,2.768) 15(-1.625,2.768) 16(-2.275,2.768)
  rect 3.58x2.94 smd: EXP(0,0)
UD-6,3X7,7_NICHICON [mm] "UD-6,3X7,7_NICHICON"
  rect 2.8x1 smd: +(2.35,0) -(-2.35,0)
WE-PD-LS [mm] "SMD Inductor, 2-Leads, Body 12.0 x 12.0 mm"
  rect 2.9x5.4 smd: 1(-4.95,0) 2(4.95,0)
  silkscreen extent -6.25,-6.25 6.25,6.25, body extent -6,-6 6,6, height 4.49

## Part data
"3V3 LED" "5V LED" LD1: library part LED0805, "LED0603 - 0603 Surface Mount Package    2mA: Green LED - Low Power (3.9mcd, 2ma, 1.7Vf) - Digikey: 475-2709-2-ND  Orange LED - Low Power (9.8mcd, 2ma, 1.8Vf) - Digikey: 475-1194-2-ND  Red LED - Low Power (5mcd, 2ma, 1.8Vf) - Digikey: 475-1195-2-ND  Yellow LED - Low Power (7mcd, 2ma, 1.8Vf) - Digikey: 475-1196-2-ND       5mA: Blue LED - Low Power (17mcd, 5ma, 2.9Vf) - Digikey: LNJ937W8CRACT-ND    0805 - 0805 Surface Mount Package    2mA: Red LED (8.8mcd, 2mA, 1.8Vf, Clear) - Low Power [Digikey: 475-2510-1-ND]  Green LED (5mcd, 2mA, 1.8Vf, Clear) - Low Power [Digikey: 475-2730-1-ND]  Yellow LED (11.3mcd, 2mA, 1.8Vf, Clear) - Low Power [Digikey: 475-2555-1-ND]       20mA: Red LED (104mcd, 20mA, Diffused) - LS R976 [Digikey: 475-1278-6-ND]  Red LED (12mcd, 20mA, 2.0Vf, Clear) - APT2012EC [Digikey: 754-1128-1-ND]  Green LED (15mcd, 20mA, 2.2Vf, Clear) - APT2012GC [Digikey: 754-1131-1-ND]  Orange LED (160mcd, 20mA, 2.1Vf, Clear) - APT2012SECK [Digikey: 754-1130-1-ND]     1206 - 1206 Surface Mount Package  Green LED (26mcd, 20mA, Diffused) - LG N971  [Digikey: 475-1407-6-ND]  Red LED (15mcd, 20mA, Diffused) - LH N974 [Digikey: 475-1416-6-ND]"
C1 C2 C3 C5 C6 C7 C8 C9 C10 C11 C12 C13 C14 C16 C17 C18 C19 C20: library part C-USC0805, "CAPACITOR, American symbol"
C4 C54 C55 C56 C103a C145a: library part C-EUC1206, "CAPACITOR, European symbol"
C15 C21 C22 C23 C25 C26 C27 C28 C29 C30 C31 C32 C33 C34 C35 C36 C37 C38 C39 C41 C43 C44 C45 C46 C47 C48 C49 C138a C139a C140a C141a C142a C143a: library part C-EUC0603, "CAPACITOR, European symbol"
C24 C42 C50: library part C-EUC0805, "CAPACITOR, European symbol"
C40: library part CPOL-EUUD-6,3X7,7, "POLARIZED CAPACITOR, European symbol", +=+
C51 C52: library part C-USC1206, "CAPACITOR, American symbol"
C53 C137a C144a: library part CPOL-EUSMCD, "POLARIZED CAPACITOR, European symbol", +=+
C57 C58: library part CMP-2000-07312-1, "Low ESR, 220 uF, 16 V, +/- 20%, -55 to 125 degC, 2-Pin SMD, RoHS, Tape and Reel", Capacitance=220000000pF, Case Code=E, Case Style=Molded, Manufacturer=AVX, Operating Temp Range=-55Cto125C, Package / Case=7343-43, Package Description="2-Pin Surface Mount Device, Body 7.3 x 4.35 mm", Package Reference=CAPMP7344X43-T, Tolerance (+ or -)=20%, Voltage=16VDC, Construction=SMTChip, Datasheet URL=http://datasheets.avx.com/TPS.pdf, Datasheet Version=01/2017, DCL=35.2uA, DELETED=Compliant, DF=10%, ESR=0.1ohm, Failure Rate=NotRequired, Insulation=NotRequired, Lead Spacing (nom)=NotRequiredmm, Length W/Weld=NotRequiredmm, Length W/Weld (max)=NotRequiredmm, Manufacturer URL=http://www.avx.com/, Mounting Style=SurfaceMount, Mounting Technology=SurfaceMount, Package URL=http://www.avx.com/download/software/literature/AVX-Footprint-Library.pdf, Packaging=TapeandReel, Polarity=Polar, Product Depth (mm)=4.3mm, Product Diameter (mm)=NotRequiredmm, Product Height (mm)=4.1mm, Product Length (mm)=7.3mm, Rad Hardened=No, Seal=NotRequired, Seated Plane Height=NotRequiredmm, Wire Form=NotRequired
D1 D2: library part CMP-2000-07172-1, "Power Schottky Rectifier, 1 A, 60 V, 2-Pin SMD (SMB), RoHS, Tape and Reel", Capacitance @ Vr, F=-, Current - Average Rectified (Io)=1A, Current - Reverse Leakage @ Vr=4µA@60V, Manufacturer=STMicroelectronics, Operating Temperature - Junction=150°C(Max), Package / Case=DO-214AA,SMB, Package Description="2-Pin Surface Mount Device, Body 4.325 x 3.625 mm", Package Reference=SMB_P, Standard Package=1, Supplier Device Package=SMB, Voltage - DC Reverse (Vr) (Max)=60V, Voltage - Forward (Vf) (Max) @ If=670mV@1A, Category=DiscreteSemiconductorProducts, Datasheet URL=http://www.st.com/content/ccc/resource/technical/document/datasheet/93/c1/06/0c/63/7c/41/d5/CD00001023.pdf/files/CD00001023.pdf/jcr:content/translations/en.CD00001023.pdf, Datasheet Version=03/2010, Diode Type=Schottky, Family=Diodes,Rectifiers-Single, Manufacturer URL=http://www.st.com/, Mounting Technology=SurfaceMount, Mounting Type=SurfaceMount, Online Catalog=SchottkyDiode, Other Names=497-7547-6, Other Related Documents=STPS160ViewAllSpecifications, Package URL=http://www.st.com/st-web-ui/static/active/en/resource/technical/document/datasheet/CD00279657.pdf, Packaging=Digi-Reel®, Reverse Recovery Time (trr)=-, Series=-, Speed=FastRecovery=200mA(Io)
D3: library part DIODESOD-323F, "Diode   SMADIODE - SMA Surface Mount Package  20V 1A Schottky Diode Digikey: 641-1014-6-ND    DO-1N4148 - Through Hole Small Current Diode SOD-123 20V 1 A (.5mV Vf) Schottky Diode - Digikey: MBRX120TPMSCT-ND    SOD-323 10V 570mA (.38mV Vf, 3ns) Schottky Diode - Digikey: ZLLS410CT-ND    SOD-523 30V 30mA Schottky Diode (RB751S-40TE61) - Digikey: RB751S-40TE61CT-ND    SOT23-R/W - SOT23 Package (R = Solder Paste/Reflow Ovens, W = Hand-Soldering)  BAT54Film 40V 300mA - Digikey: 497-7162-1-ND"
D3a: "Schottky Diode"
D4: library part DIODE, "Diode"
D5: library part CMP-2000-05145-1, "Silicon Carbide Power Schottky Diode, 5 A, -55 to 175 degC, 3-Pin TO-252, RoHS, Bulk", Continuous Forward Current If=5A, Diode Case Style=TO-252, Junction Temperature, Tj max=175degC, Manufacturer="GeneSiC Semiconductor", Operating Temperature Min=-55degC, Repetitive Reverse Voltage Vrrm Max=1.2kV, Total Capacitive Charge Qc=35nC, Datasheet URL=http://www.genesicsemi.com/images/products_sic/rectifiers/GB05SLT12-252.pdf, Datasheet Version="Rev. 3, 08/2014", Diode Configuration=Single, Manufacturer URL=http://www.genesicsemi.com/, MSL=MSL1-Unlimited, No. of Pins=3, Packaging=Each, Product Range=GENESICSEMICONDUCTOR-1200VSeries, SVHC=NoSVHC(16-Jun-2014)
D7a: "DIODE   high speed (Philips)", SpiceOrder1="SpiceOrder 1", SpiceOrder2="SpiceOrder 2"
D8a: "SCHOTTKY BARRIER RECTIFIER 3.0 AMPERES 20, 30, 40 VOLT   Source: MBRS340T3-D.pdf"
F1: library part FUSE1, "Fuse"
IC1: library part 74*1G10X, "3-input NAND gate", GND=GND, VCC=VCC
IC2: "OP AMP", V+=V+, V-=V-
IC4: library part MCP2551, "CAN transceiver"
IC21a: "High Voltage 3A, 200kHz Step-Down Switching Regulator with 100µA Quiescent Current   Spurce: www.linear.com .. 3434fb.pdf", MPN=LT3434EFE#PBF, OC_FARNELL=1501035, OC_NEWARK=57M8118
L1: library part WE-CBF_0805, "SMD EMI Suppression Ferrite Beads - excellent anti-EMI properties - low DCR - impedances till 3000 ohms - rated current up to 6 A"
L2: library part L-EUL2825P, "INDUCTOR, European symbol"
L3: library part L-EUL2012C, "INDUCTOR, European symbol"
L4: library part CMP-0227-00142-1, "SMD-Shielded Power Inductor WE-PD, L = 4.70 µH", Inductance="4.70 µH", ComponentLink1Description="Manufacturer Link", ComponentLink1URL=http://www.we-online.com, ComponentLink2Description=Datasheet, ComponentLink2URL=http://www.we-online.de/katalog/media/pdf/7447715004.pdf, DatasheetVersion="ver 1, Nov-2008", PackageDescription="SMD Inductor, 2-Leads, Body 12.0 x 12.0 mm", PackageReference=WE-PD-LS, PackageVersion=2008
L5a: library part MS85, "INDUCTOR   SMD power inductor", OC_FARNELL=unknown, OC_NEWARK=unknown
LOGO1: "Open Source Hardware Logo This logo indicates the piece of hardware it is found on incorporates a OSHW license and/or adheres to the definition of open source hardware found here: http://freedomdefined.org/OSHW"
P1: library part CMP-2000-05416-1, "Male Header, Pitch 2.54 mm, 2 x 5 Position, Height 9.85 mm, Tail Length 3.05 mm, RoHS, Tube", Color=Black, Manufacturer="TE Connectivity", Standard Package=125, 3D Model=5103308-1.pdf, Catalog Drawings=LowProfileShroudedStraight, Category=Connectors,Interconnects, Connector Type=Header,Shrouded, Contact Finish=GoldorGold-Palladium, Contact Finish Thickness=15µin(0.38µm), Contact Type=MalePin, Datasheet URL=http://www.onlinecomponents.com/productFiles/mf-AMP/eng_cat_889409_0699_96_.pdf, Datasheet Version=Apr-12, Dynamic Catalog=AMP-LatchSeries, Family=RectangularConnectors-Headers,MalePins, Featured Product=AMP-LATCHRibbonCableConnectors, Manufacturer URL=http://www.te.com/, Mating Products="1658624-1-ND / -CONNRCPT10POSPOLARGOLD / 1658527-4-ND / -CONNRCPT10POS.100W/STRRELF / 1658527-3-ND / -CONNRCPT10POS.100622SERIES / 1658526-3-ND / -CONNRCPT10POSVERTGOLD / 1658526-5-ND / -609-1041LFFEMSOCKT,LEADFREE / 1658526-4-ND / -609-1030LFFEMSOCKT,LEADFREE / ASC10B-ND / -CONNIDCSOCKET10POSGOLD / ASC10H-ND / -CONNIDCSOCKET10POS15GOLD / AKC10B-ND / -CONNIDCSKT10POSW/POLGOLD / AKC10H-ND / -CONNIDCSKT10POSW/POL15GOLD / More...", Mounting Type=ThroughHole, Number of Positions=10, Number of Positions Loaded=All, Number of Rows=2, Other Names=A33159, Packaging=Tube, RoHS Information=5103308-1StatementofCompliance, Series=AMP-Latch, Termination=Solder
P2: library part CMP-2000-06796-2, "Male Header, Pitch 2.54 mm, 2 x 10 Position, Height 9.91 mm, Tail Length 2.84 mm, -55 to 105 degC, RoHS", Manufacturer=3MInterconnectSolutions, Package Description="Male Header, Pitch 2.54 mm, 2 x 10 Position, Height 9.91 mm, Tail Length 2.84 mm", Category=ConnectorHeadersandPCBReceptacles, Contact Plating=GoldOverNickel, Datasheet URL=https://datasheet.ciiva.com/11750/0900766b807b18da-11750722.pdf, Datasheet Version=05/2007, Gender=HDR, Manufacturer URL=http://www.3m.com/, Mounting Technology=ThroughHole, Number of Contacts=20, Number of Rows=2, Package Reference=N2520-6002RB, Pitch=2.54mm, Termination Method=Solder, Type=ShroudedHeader
R1 R9: library part CMP-1018-00001-1, "Jumper 2512 (6432 Metric)", Case-EIA=2512, Case-Metric=6432, Power=None, Technology=SMT, Tolerance=None
R2 R3 R6: library part CMP-1014-00510-1, "1K 0.25W 1% 1206 (3216 Metric)  SMD", Case-EIA=1206, Case-Metric=3216, Power="0.25 W", Tolerance="1 %", Technology=SMT
R4 R5 R10 R11 R12 R13 R15 R19 R20 R22 R23 R24 R25 R26 R29 R32 R33 R104a R104b: library part R-US_R0805, "RESISTOR, American symbol"
R14 R16 R17 R18 R21 R30 R34 R35 R36 R37 R38 R39 R40 R41 R42 R43 R44 R45 R46 R47 R48 R49 R50 R51 R52 R53 R54 R55 R56 R57 R58 R59 R60 R61 R62 R63 R64 R65 R66 R67 R68 R69 R70 R71 R72 R73 R74 R75 R76 R105a R106a R107a: library part R-EU_R0603, "RESISTOR, European symbol"
R27: library part CMP-2100-03673-1, "Chip Resistor, 0 Ohm, Jumper, +/- 5%, 0.125 W, -55 to 155 degC, 0805 (2012 Metric), RoHS, Tape and Reel", Case/Package=0805, Case Code (Metric)=2012, Manufacturer=Yageo, Max Operating Temperature=155degC, Min Operating Temperature=-55degC, Package Description="2-Pin Surface Mounted Device, Body 2 x 1.25 mm", Power Rating=125mW, Resistance=0mOhm, Temperature Coefficient=200ppm/degreesC, Tolerance=5%, Voltage Rating=150V, Case Code (Imperial)=0805, Composition=ThickFilm, Contact Plating=Tin, Datasheet URL=http://www.yageo.com/NewPortal/yageodocoutput?fileName=/pdf/R-Chip/PYu-RC_Group_51_RoHS_L_5.pdf, Datasheet Version="Rev. 5, 10/2016", Depth=1.25mm, Height=0.5mm, Lead Free=LeadFree, Length=2mm, Manufacturer URL=http://www.yageo.com/, Military Standard=Not, Number of Pins=2, Package Reference=0805, Packaging=TapeandReel, Radiation Hardening=No, REACH SVHC=Unknown, RoHSCompliant=true, Termination=SMD/SMT, Voltage Rating (DC)=150V, Width=1.25mm
R28 R31: library part CMP-1013-00001-1, "Jumper 0805 (2012 Metric)", Case-EIA=0805, Case-Metric=2012, Power=None, Technology=SMT, Tolerance=None
SW1 SW2: library part CMP-2100-03586-1, "Ultra-Small Tactile Switch, 0.05 A, 12 V, -25 to 70 degC, 2-Pin SMD, RoHS, Tape and Reel", Case/Package=SMD/SMT, Contact Current Rating=50mA, Insulation Resistance=100MOhm, Manufacturer="Omron Electronic Components", Max Operating Temperature=70degC, Min Operating Temperature=-25degC, Operating Force=1.5N, Package Description="2-Pin Surface Mount Device, Body 3 x 2.5 mm", Package Quantity=1, Package Reference=B3U-1000, Voltage Rating (DC)=12V, Actuator Length=0.4mm, Contact Material=Silver, Current Rating=50mA, Datasheet URL=http://www.omron.com/ecb/products/pdf/en-b3u.pdf, Datasheet Version=42005.0, Depth=2.5mm, Electrical Life=200000Cycles, Height=1.2mm, Illumination Type=Illuminated, Lead Free=LeadFree, Length=4mm, Manufacturer URL=http://www.omron.com/, Max Current Rating=50mA, Mount=SurfaceMount, Orientation=Straight, Packaging=TapeandReel, REACH SVHC=Unknown, RoHSCompliant=true, Switch Travel=0.15mm, Termination=SMD/SMT, Throw Configuration=SPST, Weight=0.022g, Width=3mm
TP1 TP2 TP3 TP4 TP5 TP6 TP7 TP21a TP26 TP27 TP29 TP30 TP31 TP32 TP33 TP34 TP35 TP36 TP37 TP38 TP39 TP40: "TEST PIN"
  TP1 TP21a TP40: TP_SIGNAL_NAME=>TP_SIGNAL_NAME
U1: library part CMP-2000-04953-1, "High-Voltage, High-Current Darlington Transistor Array, 0.5 A, 50 V, -20 to 70 degC, 16-Pin SOIC (D), Green (RoHS & no Sb/Br), Tape and Reel", Manufacturer=TexasInstruments, Maximum Collector Emitter Saturation Voltage=1.1@100mA, Maximum Collector Emitter Voltage=50V, Package=16SOIC, Package Description="16-Pin Plastic Small Outline, Body 9.9 x 3.9 mm, Pitch 1.27 mm", Package Reference=D16, Package Version="4040047-6/M, 06/2011", Peak DC Collector Current=0.5A, Category=DarlingtonBJT, Configuration=Array7, Datasheet URL=http://www.ti.com/general/docs/lit/getliterature.tsp?genericPartNumber=uln2003a&fileType=pdf, Datasheet Version="Rev. O, 01/2016", Manufacturer URL=http://www.ti.com/, Mounting=SurfaceMount, Package URL=http://www.ti.com/lit/ml/mpds178g/mpds178g.pdf, Packaging=Tape&Reel, Rad Hard=No, Type=NPN
U2: library part CMP-0237-00108-3, "ARM Cortex-M3 32-bit MCU, 1024 KB Flash, 96 KB Internal RAM, 80 I/Os, 100-pin LQFP, -40 to 85 degC, Tray", I/Os (High Current)=80, Operating Frequency(F) (Processor speed) (MHz)=72, Supply Voltage(Vcc) min (V)=2, A/D Converter="3x12-bit (16 Channel)", ComponentLink1Description="Manufacturer URL", ComponentLink1URL=http://www.st.com/web/en/home.html, ComponentLink2Description=Datasheet, ComponentLink2URL=http://www.st.com/st-web-ui/static/active/en/resource/technical/document/datasheet/CD00253742.pdf, ComponentLink3Description="Package Specification", ComponentLink3URL=http://www.st.com/st-web-ui/static/active/en/resource/technical/document/data_brief/DM00071938.pdf, Core="ARM Cortex-M3", D/A Converter="2x12-bit (2 Channel)", DatasheetVersion="Rev. 3", FLASH Size (Prog) (kB)=1024, Internal RAM Size (kB)=96, Mounting Technology="Surface Mount", PackageDescription="100-Pin Low Profile Quad Flat Package, 14 x 14 mm Body, 0.5 mm Pitch", PackageReference=LQFP100, PackageVersion="Rev. 1, 06/2013", Packing=Tray, PartId=1, PartNumber=STM32F103VGT6
U3: library part CMP-1305-00037-1, "Single Supply Quad Comparators, -40 to 125 degC, 14-Pin SOIC, Pb-Free, Tube", Manufacturer="On Semiconductor", ComponentLink1Description="Manufacturer URL", ComponentLink1URL=http://www.onsemi.com/, ComponentLink2Description=Datasheet, ComponentLink2URL=http://www.onsemi.com/pub_link/Collateral/LM339-D.PDF, ComponentLink3Description="Package Specification", ComponentLink3URL=http://www.onsemi.com/pub_link/Collateral/751A-03.PDF, DatasheetVersion="Rev. 20", IO Typ (mA)=16, Mounting Technology="Surface Mount", PackageDescription="14-Pin Small Outline Integrated Circuit, Body 8.65 x 3.9 mm, Pitch 1.27 mm", PackageReference=SOIC-14-751A-03, PackageVersion="Rev. K, 05/2011", Packing=Tube, PartId=1, PartNumber=LM2901VDG, RoHS=TRUE
U4: library part CMP-0069-00298-3, "5A SIMPLE SWITCHER®, Step-Down Voltage Regulator with Adjustable Soft-Start and Current Limit, 7-pin TO-263 Thin, Pb-Free", Manufacturer="Texas Instruments", PackageTopMarking=NSUZXYTTE#*LM22679*TJ-5.0, PowerWise=N, ComponentLink1Description="Datasheet URL", ComponentLink1URL=http://www.ti.com/general/docs/lit/getliterature.tsp?genericPartNumber=LM22679&fileType=pdf, CompType=Switcher, PackageDescription="Thin TO-263, Molded, 9.85 x 10.16 x 2mm Body, 7 Lead, 1.27mm Pitch, Surface Mount", PackageReference=NDR0007A, PinCount=7, RoHS=Y
X1: library part CMP-2000-05407-1, "Surface Mount Type B Mini USB, 5 Positions, 0.8 mm Pitch, 0 to 50 degC, RoHS, Tape and Reel", Color=Black, Manufacturer="TE Connectivity", Maximum Current Rating=N/A, Body Orientation=RightAngle, Contact Material=PhosphorBronze, Contact Plating=GoldOverNickel, Datasheet URL=https://datasheet.ciiva.com/11759/0900766b80ed62f8-11759638.pdf, Datasheet Version="Rev. B1, 07/2010", Dimension=4.14mm, Gender=RCP, Housing Material=Thermoplastic, Manufacturer URL=http://www.te.com/, Maximum Voltage Rating=N/A, Mounting=SurfaceMount, Number of Contacts=5, Number of Ports=1, Number of Terminals=5, Operating Temperature=N/A, Packaging=TapeandReel, Part No=1734035-2, Pitch=0.8mm, RoHS=Yes, Termination Method=Solder, Type=USB
X2: library part MX34028UF1
Y1: library part CRYSTAL-3.2-2.5, 1=1, 2=2, 3=3
Y2: library part ARDUINO_WIFI_SHIELD_V018_TG_RESONATOR_EPSON_FC_145
Z1 Z2: library part VARISTORCN0603, "VARISTOR"

## Free pads (board coordinates)
  round 8 hole 4.3: 2(25,25) 3(25,95) 4(160.939,94.898) 5(195,95) 6(195,25) 7(100,25)

## Via types
v1: diameter 0.762, hole 0.381, Top Layer to Bottom Layer, 220 vias
v2: diameter 1.27, hole 0.711, Top Layer to Bottom Layer, 56 vias
v3: diameter 1, hole 0.5, Top Layer to Bottom Layer, 7 vias
v4: diameter 2, hole 1, Top Layer to Bottom Layer, 7 vias
v5: diameter 3, hole 1.5, Top Layer to Bottom Layer, 2 vias
v6: diameter 1.27, hole 0.7, Top Layer to Bottom Layer, 1 vias
v7: diameter 1, hole 0.381, Top Layer to Bottom Layer, 1 vias

## Nets (pads, with @x,y where several pads share a name; then routed paths per layer and width w, separated by ;. In a path a pad name is that pad's centre, name@x,y a point inside that pad or via, vN(x,y) a via of type N, cw(c..) or ccw(c..) an arc to the next point about the centre after c; other vN are vias at no path point)
+3V3: C2.1 C3.1 C5.1 C6.1 C13.1 C17.1 C18.1 C141a.2 C143a.1 C144a.+ C145a.1 D7a.A IC1.5 IC4.5 IC21a.10 L1.1 L3.1 L5a.2 LD1.A P2.1 P2.2 R1.1 R4.2 R12.2 R22.2 R23.2 R24.2 R25.2 R26.2 R28.2 R104a.2 R105a.1 TP21a.TP U2.11 U2.28 U2.50 U2.75 U2.100 | length 204.1
  Top Layer w0.3: C145a.1@40.823,58.901 C145a.1@41.124,58.901
  Top Layer w0.305: R1.1@83.714,42.926 83.714,40.111 v1(83.718,40.107) ; LD1.A@95.682,57.895 95.893,57.683 96.35,58.141 v1(97.434,58.141) ; C17.1@99.242,47.828 100.228,47.828 100.5,48.1 ; v1(99.949,66.65) v1(99.949,66.65) C18.1@99.95,69.6 101.774,69.6 103.735,67.639 U2.75@103.735,65.032 ; v1(101.27,48.108) 101.262,48.1 100.5,48.1 ; U2.100@102.21,51.507 100.907,51.507 100.5,51.1 100.5,48.1 ; v1(104.089,42.215) 104.572,42.697 106.223,42.697 106.783,43.258 C6.1@106.783,43.993 106.783,45.036 108.735,46.987 U2.11@108.735,49.982 ; L1.1@113.767,38.168 113.792,38.143 v1(113.792,35.23) ; U2.28@117.26,52.507 118.75,52.507 v1(119.405,53.162) ; U2.50@117.26,63.507 118.992,63.507 119.493,64.008 C3.1@122.999,64.008 ; v1(121.691,65.456) 121.717,65.43 122.96,65.43 123.151,65.239 C3.1@123.151,64.237
  Top Layer w0.381: IC21a.10@53.845,37.417 54.513,37.417 55.174,36.756 55.174,35.105 57.714,35.105 58.056,34.763 C141a.2@58.056,33.962 v2(59.492,33.962) ; R105a.1@58.056,38.153 58.31,38.407 v2(59.492,38.407) ; R22.2@78.9,64.05 R23.2@81.5,64.05 R24.2@84,64.05 85.2,64.05 ; v1(85.2,65.4) 85.2,64.05 ; R26.2@89.3,64.05 R25.2@86.6,64.05 85.2,64.05 ; R28.2@94.15,50.8 94.6,50.8 94.905,51.105 v1(95.199,51.105) ; C5.1@98.7,51.1 100.5,51.1 ; v1(119.405,53.162) 120.888,53.162 C2.1@120.85,53.2 C2.1@120.8,53.15 ; v1(119.9,40.1) R4.2@121.7,40.1 ; v1(135.8,51.8) 135.85,51.75 R12.2@135.85,50.3 ; v1(135.9,48.9) 136.5,48.3 IC1.5@136.5,46.225 136.5,45.4 136.6,45.3 138,45.3 138.85,46.15 C13.1@139.7,46.15
  Top Layer w0.5: R104a.2@26.472,57.457 TP21a.TP@31.044,57.457 ; C143a.1@60.469,43.36 v2(62.286,43.36)
  Top Layer w0.508: IC4.5@90.983,80.07 90.983,81.61 91.135,81.763 v1(95.225,81.763) ; v1(143.9,68.4) L3.1@146.1,68.4
  Top Layer w1: TP21a.TP@31.044,57.457 36.657,57.457 C144a.+@37.013,57.101
  Bottom Layer w0.5: v2(59.492,33.962) 59.492,32.311 58.73,31.549 43.236,31.549 41.204,33.581 41.204,50.091 39.172,52.123 v2(37.521,52.123) 37.521,51.488 39.553,49.456 39.553,32.565 42.093,30.025 59.238,30.025 61.524,32.311 61.524,36.883 v2@60,38.407 ; v2(59.492,38.407) v2@60,38.407 ; v2(62.286,43.36) 62.286,40.693 v2@60,38.407
+5V: C19.1 C37.1 C47.1 C57.1 C58.1 IC3.4 IC3.5 IC4.3 L2.1 L4.2 R2.2 R3.2 R30.2 R34.2 R60.2 R61.1 R62.2 R67.1 R70.1 R104b.2 TP40.TP U3.3 X3.1 X3.5 X3.9 X3.13 | length 115.3
  Top Layer w0.381: R60.2@27.45,79.3 27.45,77.95 v1(27.5,77.9) ; R70.1@37.45,89.3 37.45,88.75 38.2,88 39.7,88 v1(40.3,87.4) ; v1(44,80.4) 44,77.7 43.75,77.45 R62.2@43.1,77.45 43.1,76.6 43.4,76.3 46.4,76.3 46.9,76.8 ; R61.1@46.9,77.45 46.9,76.8 ; R67.1@50.7,77.45 50.7,76.7 50.3,76.3 47.4,76.3 46.9,76.8 ; R34.2@128.55,43.8 128.55,44.55 128.8,44.8 v1(131.6,44.8) ; C19.1@130.4,31.85 130.4,29.6 130.8,29.2 ; v1(131.4,29.9) 130.8,29.3 130.8,29.2 ; U3.3@136.23,30.04 136.23,28.63 135.6,28 132,28 130.8,29.2 ; 141.2,83.2 141.3,83.3
  Top Layer w1: v3(84.404,75.667) 84.441,75.667 C47.1@85.598,76.823 86.171,76.823 86.665,77.318 88.9,77.318 89.713,76.505 IC4.3@89.713,74.87 ; C37.1@132.08,81.85 132.633,82.404 L2.1@135.204,82.404 136,83.2 141.2,83.2 141.2,86.1 150.286,86.1 v1(150.292,86.106) ; 141.3,83.3 IC3.5@144.95,83.3 IC3.4@146.85,83.3 ; R2.2@185.754,66.319 185.754,62.252 187.477,60.528 C58.1@187.477,56.188 ; v4@192.758,56.188 194.684,58.114 R104b.2@194.684,61.944
  Top Layer w1.27: R30.2@133.2,40.65 v1(133.2,41.8)
  Top Layer w2: L4.2@166.573,55.4 180.137,55.4 C57.1@180.924,56.188 C58.1@187.477,56.188 v4@192.758,56.188
  other v4: 192.786,56.159
+5V_USB: C9.1 C10.1 D2.1 R13.1 X1.1 | length 40.4
  Top Layer w0.508: D2.1@86.97,94.49 90.781,94.49 92.177,95.885 94.818,95.885 95.783,94.92 ; X1.1@96.53,92.015 96.53,93.742 95.783,94.488 95.783,94.92 ; C9.1@100.845,82.229 C9.1@100.995,82.379 C10.1@103.095,82.379 106.655,85.939 106.655,93.32 104.739,95.235 R13.1@102.718,95.235 98.262,95.235 97.384,96.114 96.672,96.114 95.783,95.225 95.783,94.92
+9V2: C40.+ C41.2 D3.C IC2.2 R48.2 | length 31.8
  Top Layer w0.508: D3.C@144.9,75.7 144.9,74.5 145.2,74.2 146.3,74.2 146.8,74.7 R48.2@146.8,75.95
  Top Layer w0.762: IC2.2@121.9,70.235 123.965,70.235 123.965,72.251 125.565,73.85 C41.2@134.5,73.85
  Top Layer w1.27: C41.2@134.5,73.85 135.95,72.4 142.8,72.4 144.9,74.5
+12V: C53.+ C54.1 C55.1 C103a.1 C137a.+ D1.2 D2.2 D3a.2 F1.2 IC21a.3 IC21a.4 IC21a.15 R75.1 U4.2 | length 367.2
  Top Layer w0.3: 45.014,39.804 v2(45.014,41.963) ; IC21a.15@53.845,40.667 54.513,40.667 54.793,40.947 54.793,42.471 v2(54.539,42.725)
  Top Layer w0.381: 46.902,40.017 IC21a.3@48.309,40.017
  Top Layer w0.508: v1(76.6,86.5) 76.6,86.1 78.1,84.6 R75.1@78.1,82.931
  Top Layer w0.8: 173.736,75.743 173.66,75.667 173.66,74.549 176.378,74.549 176.53,74.397 U4.2@176.53,70.426
  Top Layer w1: v3(85.827,86.436) 85.827,89.127 D2.2@86.97,90.27 ; C53.+@157.607,77.369 159.185,77.369 C54.1@160.731,75.823 C55.1@163.144,75.823
  Top Layer w2: v4(25,72.1) 25,69.2 F1.2@25.1,69.1 23,67 23,38.3 24.9,36.4 32.154,36.4 D3a.2@32.154,35.313 ; 28.9,36.4 28.9,31.2 32.7,27.4 D1.2@55.19,27.4 ; v4(154.737,85.115) 156.464,83.388 157.607,83.388 ; C53.+@157.607,77.369 157.607,83.388 ; 173.736,75.743 173.736,83.033 173.38,83.388 157.607,83.388
  Bottom Layer w0.5: v2(45.014,41.963) 45.776,42.725 v2(54.539,42.725)
  Bottom Layer w0.508: v4(46.4,97.1) 46.4,91 49.4,88 75.1,88 v1(76.6,86.5)
  Bottom Layer w1: 85.7,98.298 85.827,98.171 v3(85.827,86.436)
  Bottom Layer w2: v4(25,72.1) 23.7,73.4 23.7,86.5 23.9,86.7 31.4,86.7 34.4,89.7 34.4,91.5 35.5,92.6 35.5,95.4 37.2,97.1 v4(46.4,97.1) 47.598,98.298 85.7,98.298 153.314,98.298 154.864,96.749 154.737,96.622 v4(154.737,85.115)
+12VIN: D4.1 X2.1 | length 31.6
  Top Layer w2: D4.1@23.5,86.575 31.275,86.575 34.4,89.7 34.4,91.4 35.4,92.4 35.4,95.2 41.9,95.2 43.1,94 X2.1@48.4,94
BOOT0: R28.1 R31.2 U2.94 | length 11.9
  Top Layer w0.203: R28.1@92.25,50.8 92.8,51.35 92.8,51.8 94.25,53.25 R31.2@94.25,53.5 95.5,53.5 96.507,54.507 U2.94@102.21,54.507
BUT: R5.1 U2.23 | length 16.4
  Top Layer w0.203: U2.23@114.735,49.982 114.735,48.054 116.078,46.711 118.542,46.711 119.151,46.101 119.151,40.157 117.944,38.95 R5.1@116.3,38.95
CANH: IC4.7 X2.26 | length 19.8
  Top Layer w0.203: X2.26@75.9,91 75.9,89.2 81.356,83.744 87.63,83.744 88.443,82.931 IC4.7@88.443,80.07
CANL: IC4.6 X2.27 | length 23.1
  Top Layer w0.203: X2.27@77,94 77,89.167 81.839,84.328 88.544,84.328 89.713,83.16 IC4.6@89.713,80.07
DGND: "3V3 LED.C" "5V LED.C" C1.2 C2.2 C3.2 C5.2 C6.2 C9.2 C10.2 C11.2 C13.2 C15.2 C16.1 C17.2 C18.2 C19.2 C20.1 C21.2 C22.2 C25.2 C26.2 C27.2 C28.1 C29.2 C30.2 C31.2 C32.2 C33.2 C34.2 C35.2 C36.2 C37.2 C38.1 C39.1 C40.- C41.1 C42.2 C43.2 C44.2 C45.2 C46.2 C47.2 C48.2 C49.2 C50.2 C51.2 C52.2 C53.- C54.2 C55.2 C56.2 C57.2 C58.2 C103a.2 C137a.- C140a.2 C142a.2 C144a.- C145a.2 D3a.1 D5.2 D8a.1 IC1.2 IC2.4 IC3.2 IC4.2 IC4.8 IC21a.8 IC21a.14 IC21a.EXP P1.2 P2.4 P2.6 P2.8 P2.10 P2.12 P2.14 P2.16 P2.18 P2.20 R3.1 R6.1 R9.2 R15.2 R29.2 R31.1 R32.2 R33.2 R49.1 R50.1 R51.1 R52.1 R53.1 R54.1 R55.1 R56.1 R57.1 R59.1 R65.1 R66.2 R71.1 R74.1 R76.2 R106a.1 R107a.1 SW1.1 SW2.1 TP1.TP U1.6 U1.8 U2.10 U2.27 U2.49 U2.74 U2.99 U3.12 U4.4 U4.8 X1.5 X1.6 X1.7 X1.8 X1.9 X2.3 X2.19 X2.28 X3.2 X3.6 X3.10 X3.14 Y1.2 Y1.4 Z1.2 Z2.2 | length 386.5
  Top Layer w0.203: C2.2@122.35,53.2 v1(123.7,53.2)
  Top Layer w0.254: 56.063,42.725 v1(56.063,43.741) ; C3.2@124.651,64.237 124.651,64.707 v1(125.349,65.405)
  Top Layer w0.305: C16.1@93.447,36.674 93.447,35.56 94.437,34.569 95.377,34.569 ; v1(95.352,33.934) 95.377,33.96 95.377,34.569 ; 97.2,52.2 97.375,52.375 99.543,52.375 99.91,52.007 U2.99@102.21,52.007 ; C20.1@97.206,36.699 97.206,35.331 96.444,34.569 95.377,34.569 ; C18.2@98.45,69.6 98.45,70.51 98.806,70.866 101.27,70.866 104.235,67.901 U2.74@104.235,65.032 ; v2(102.692,36.17) 102.692,37.817 C51.2@102.946,38.071 ; v1(103.073,43.231) 104.521,43.231 C6.2@105.283,43.993 105.283,44.78 108.235,47.732 U2.10@108.235,49.982 ; Y1.2@105.174,38.071 Y1.2@105.298,38.194 ; C52.2@109.579,40.495 C52.2@109.703,40.618 ; U2.27@117.26,52.007 121.959,52.007 122.35,52.398 C2.2@122.35,53.2 ; U2.49@117.26,63.007 124.638,63.007 C3.2@124.638,64.033 ; R9.2@123.55,44.171 124.155,44.171 125.019,45.034 v1(125.07,45.034)